# EAGLE board PCB_v42 (EAGLE 9.7.0)
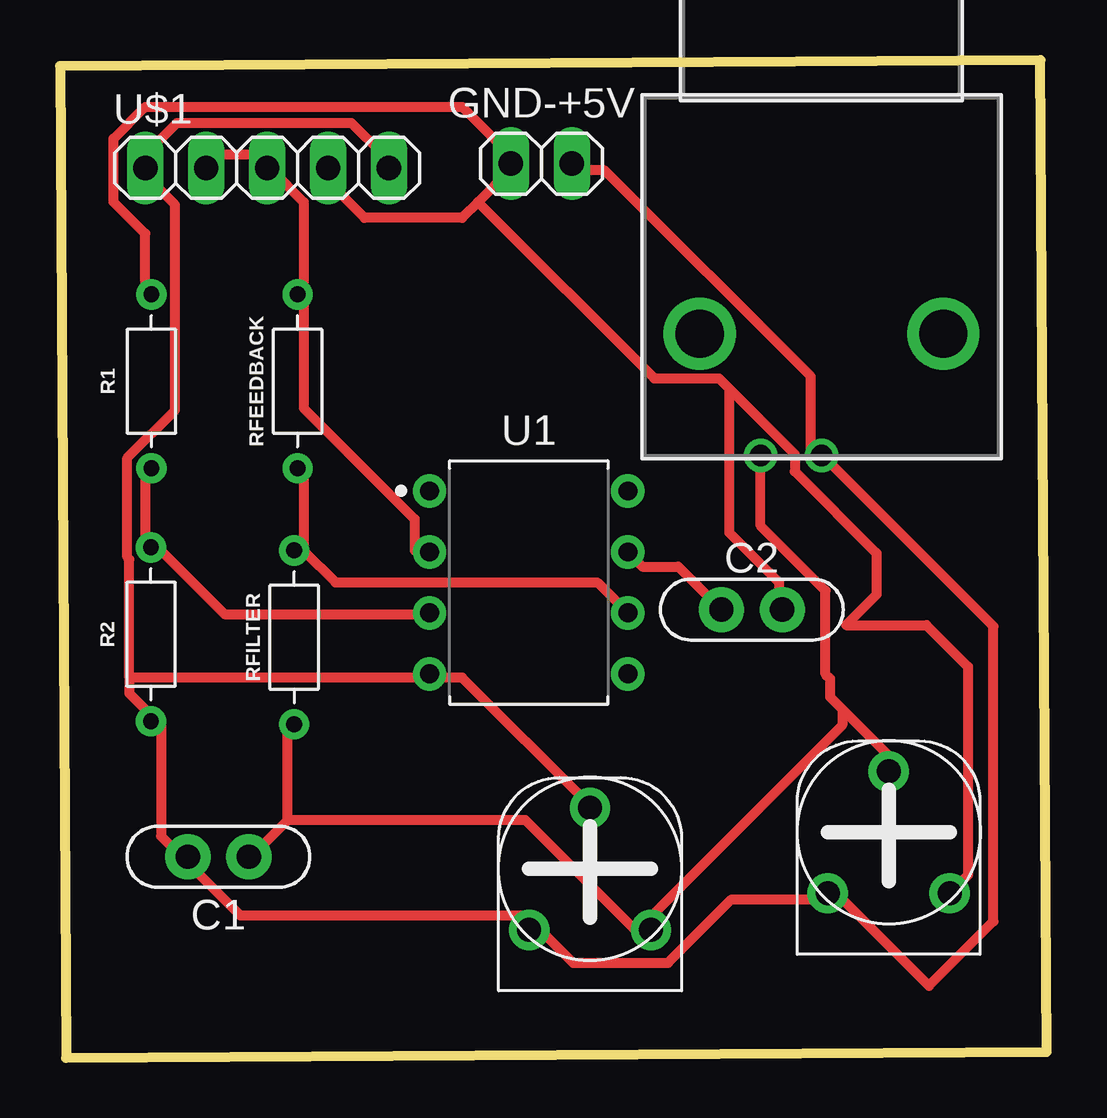
[diagram p0: board, top side]
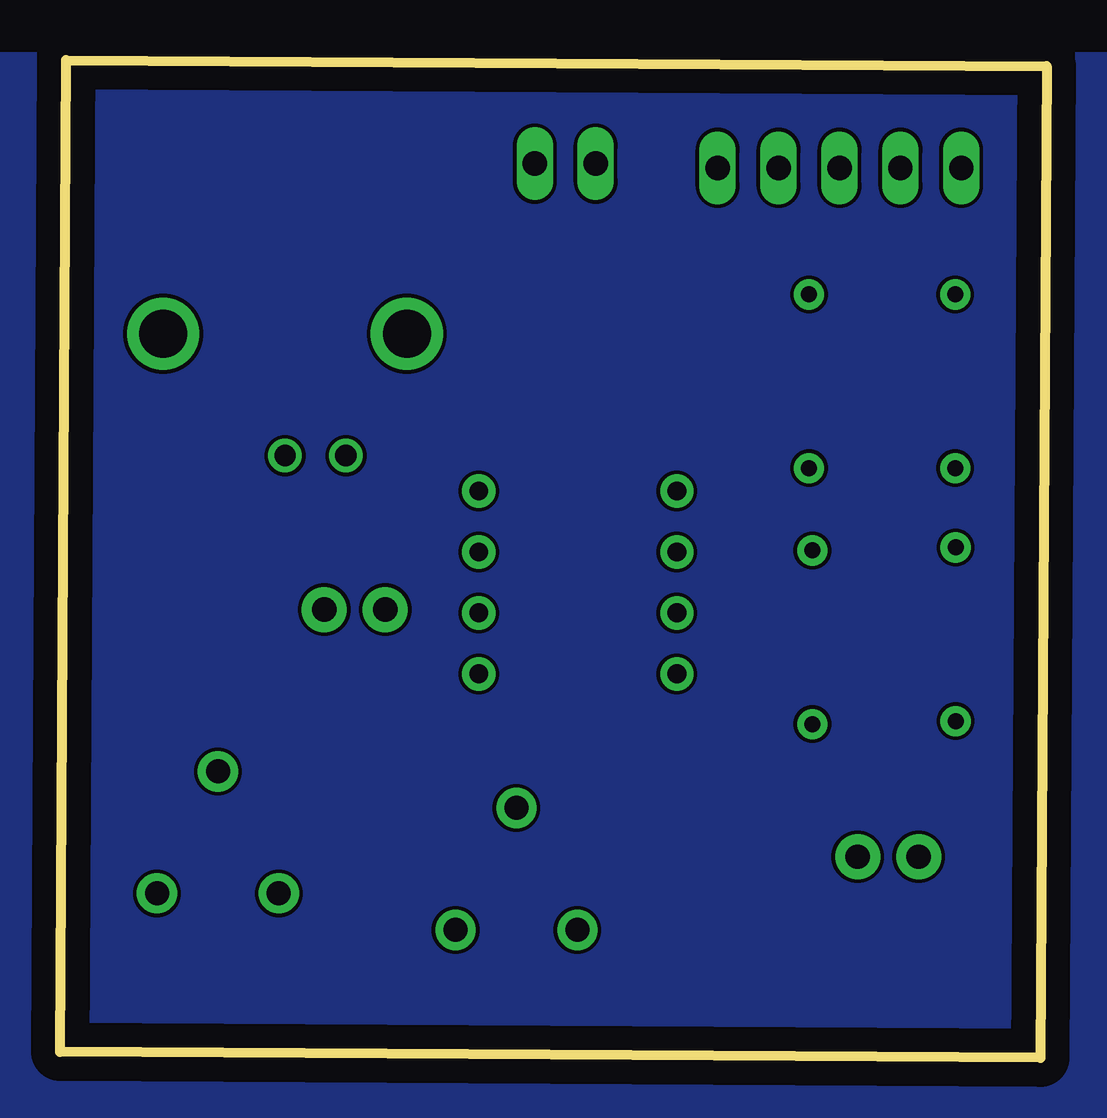
[diagram p1: board, bottom side, seen from below]

Size 41.13 x 41.58 mm. Coordinates in mm from the lower left corner, seen from the top.
Outline: 0.25,0 41.13,0.25 40.87,41.58 0,41.33 0.25,0
Copper layers (1*16): Top 0.035mm / dielectric 1.5mm / Bottom 0.035mm
Design rules "Fusion Electronics Design Rules": minimum track width 6mil, minimum drill 0.35mm, track to track 6mil, track to pad 6mil, pad to pad 6mil, via to via 6mil, smd to smd 6mil, copper to edge 40mil, drill to drill 6mil, minimum pad ring 10mil, minimum via ring 8mil, stop-mask expansion 4mil, vias tented up to drill 9999mil, thermal gap 10mil

## Footprints (pad centres in the part's own frame; a part is rotated, then mirrored left to right if it is on the bottom)
CAP-THRU-2.54MM = drill 1.016 pad 1.88: 1 -1.27,0; 2 1.27,0
1X02 = drill 1.016 long: 1 -1.27,0; 2 1.27,0
CONN_CONBN_LNX = drill 0.889 pad 1.397: 1 -2.54,-7.455; 2 0,-7.455 | drill 2.007 pad 2.007: 3 -5.08,-2.375; 5 5.08,-2.375
RESAD724W46L381D178B = drill 0.66 pad 1.26: 1 -3.62,0; 2 3.62,0
HA-06-SM065 = drill 1 pad 1.676: 1 -2.54,-2.54; 2 0,2.54; 3 2.54,-2.54
DIP826W53P254L959H508Q8B = drill 0.786 pad 1.386: 1 -4.13,3.81; 2 -4.13,1.27; 3 -4.13,-1.27; 4 -4.13,-3.81; 5 4.13,-3.81; 6 4.13,-1.27; 7 4.13,1.27; 8 4.13,3.81
1X05 = drill 1.016 long: 1 -5.08,0; 2 -2.54,0; 3 0,0; 4 2.54,0; 5 5.08,0

## Placement (x,y rotation side)
C1  10u  [CAP-THRU-2.54MM]  6.6,8.38 180 top
C2  10u  [CAP-THRU-2.54MM]  28.84,18.68 0 top
GND-+5V  PINHD-1X2  [1X02]  20.07,37.26 0 top
J2  CONBNC002CONN_CONBN_LNX  [CONN_CONBN_LNX]  31.74,32.55 0 top
R1  1k  [RESAD724W46L381D178B]  3.81,28.19 90 top
R2  1k  [RESAD724W46L381D178B]  3.79,17.65 90 top
R3  [HA-06-SM065]  34.54,9.4 0 top
R4  [HA-06-SM065]  22.1,7.87 0 top
RFEEDBACK  24M  [RESAD724W46L381D178B]  9.91,28.19 270 top
RFILTER  47k  [RESAD724W46L381D178B]  9.76,17.53 270 top
U1  LM741  [DIP826W53P254L959H508Q8B]  19.54,19.81 0 top
U$1  PINHD-1X05_1X05M  [1X05]  8.64,37.08 0 top

## Library data of the parts
C1 C2 R3 R4 U$1 = Tinkercad
GND-+5V = Connector; CATEGORY: Connectors; DESCRIPTION: Header-Straight-2 Position; PACKAGE_TYPE: Through Hole; PITCH: 0.100" (2.54mm); SUBCATEGORY: Headers; TYPE: Male Pins
J2 = CONBNC002_Library; COPYRIGHT: Copyright (C) 2025 Ultra Librarian. All rights reserved.; MANUFACTURER_NAME: Linx Technologies; MANUFACTURER_PART_NUMBER: CONBNC002
R1 R2 RFEEDBACK RFILTER = Resistor; CATEGORY: Resistors; DESCRIPTION: Axial Resistor 7.24 mm pitch 3.81 mm body length 1.78 mm body diameter; PACKAGE_SIZE: Axial; PACKAGE_TYPE: Through Hole
U1 = IC_Linear; CATEGORY: Linear ICs; DESCRIPTION: General Purpose Amplifier 1 Circuit 8-PDIP; PACKAGE_SIZE: 8-PDIP; PACKAGE_TYPE: Through Hole; ROHS: Compliant; SERIES: LM741; SUBCATEGORY: Amplifiers; TYPE: General Purpose

## Nets
+5V: C2.2 GND-+5V.1 R1.2 R3.3 U$1.4
AGND: C1.2 GND-+5V.2 J2.2 R2.1 R3.1 R4.1 R4.2 U1.4 U$1.1 U$1.5
N$1: C2.1 U1.7
N$2: C1.1 J2.1 R3.2 R4.3 RFILTER.2
N$3: RFEEDBACK.2 RFILTER.1 U1.6
N$4: R1.1 R2.2 U1.3
N$5: RFEEDBACK.1 U1.2 U$1.2 U$1.3

## Tracks (layer width: path | path; a pad name or v marks a point on that pad's centre or on a via)
+5V
  Top 0.152: 27.89,27.89 | 29.97,18.75 C2.2
  Top 0.406: R3.3 37.85,7.62 37.85,16.31 36.12,18.03 32.77,18.03 34.04,19.3 34.04,21.03 30.63,24.43 30.63,25.16 27.89,27.89 27.48,28.31 24.77,28.31 17.42,35.66 | R1.2 3.56,32.36 3.56,34.34 2.24,35.66 2.24,38.3 3.56,39.62 16.76,39.62 18.75,37.64 GND-+5V.1 18.75,36.98 17.42,35.66 | 17.42,35.66 16.76,35 12.69,35 11.18,36.52 U$1.4 | 29.97,18.75 29.97,19.81 27.89,21.89 27.89,27.89
AGND
  Top 0.152: 3.56,36.78 U$1.1
  Top 0.406: GND-+5V.2 21.39,36.98 22.71,36.98 31.29,28.4 31.29,25.09 J2.2 31.8,25.09 38.91,17.98 38.91,5.69 36.22,3 32.36,6.86 R3.1 31.95,6.6 27.99,6.6 25.35,3.96 21.39,3.96 20.07,5.28 R4.1 19.41,5.94 7.52,5.94 5.54,7.92 C1.2 4.88,8.59 4.22,9.25 4.22,13.87 R2.1 3.79,14.29 2.9,15.19 2.9,15.85 | R4.2 22.05,10.57 16.76,15.85 15.44,15.85 U1.4 15.26,15.85 2.9,15.85 | U$1.1 3.56,37.64 4.88,38.96 12.14,38.96 13.46,37.64 U$1.5 | 2.9,15.85 2.9,20.77 2.81,20.86 2.81,25 4.8,27 4.8,35.54 3.56,36.78
GND
  pour Bottom: -3.86,-2.34 51.48,-2.34 53.9,0.08 53.9,36.24 48.43,41.71 -3.86,41.71
N$1
  Top 0.406: U1.7 24.28,20.47 25.78,20.47 C2.1
N$2
  Top 0.2: 32.21,14.94 32.11,15.04
  Top 0.406: 9.5,9.91 9.5,13.87 RFILTER.2 | 9.5,9.91 8.18,8.59 C1.1 | 32.61,14.53 34.59,12.55 R3.2 | 32.61,14.53 32.21,14.94 | 32.61,14.53 32.61,13.87 24.69,5.94 R4.3 24.03,5.28 19.41,9.91 9.5,9.91 | 32.11,15.04 32.11,15.8 31.91,15.99 31.91,19.47 29.21,22.18 J2.1
N$3
  Top 0.406: 10.16,21.13 10.16,24.43 RFEEDBACK.2 | 10.16,21.13 11.48,19.81 22.4,19.81 U1.6 | 10.16,21.13 RFILTER.1
N$4
  Top 0.406: R1.1 3.56,24.43 3.56,21.79 R2.2 4.22,21.13 6.86,18.49 14.78,18.49 U1.3
N$5
  Top 0.406: U1.2 14.78,21.13 14.78,22.45 10.16,27.08 10.16,31.7 RFEEDBACK.1 10.16,32.36 10.16,35.66 8.84,36.98 U$1.3 8.18,37.64 6.2,37.64 U$1.2